# Altium PCB MIET_464512_002_E3.PcbDoc
Units mm, origin at the board's own origin, x right, y up, seen from the top; angles counter-clockwise.
Board outline 137.75 x 63.75 mm, 2 copper layers (Top Layer, Bottom Layer), stack 1.535 mm thick; 68 components, 92 nets, 342 pads, 86 vias.
Unrouted connection lines stored in the file: 4.
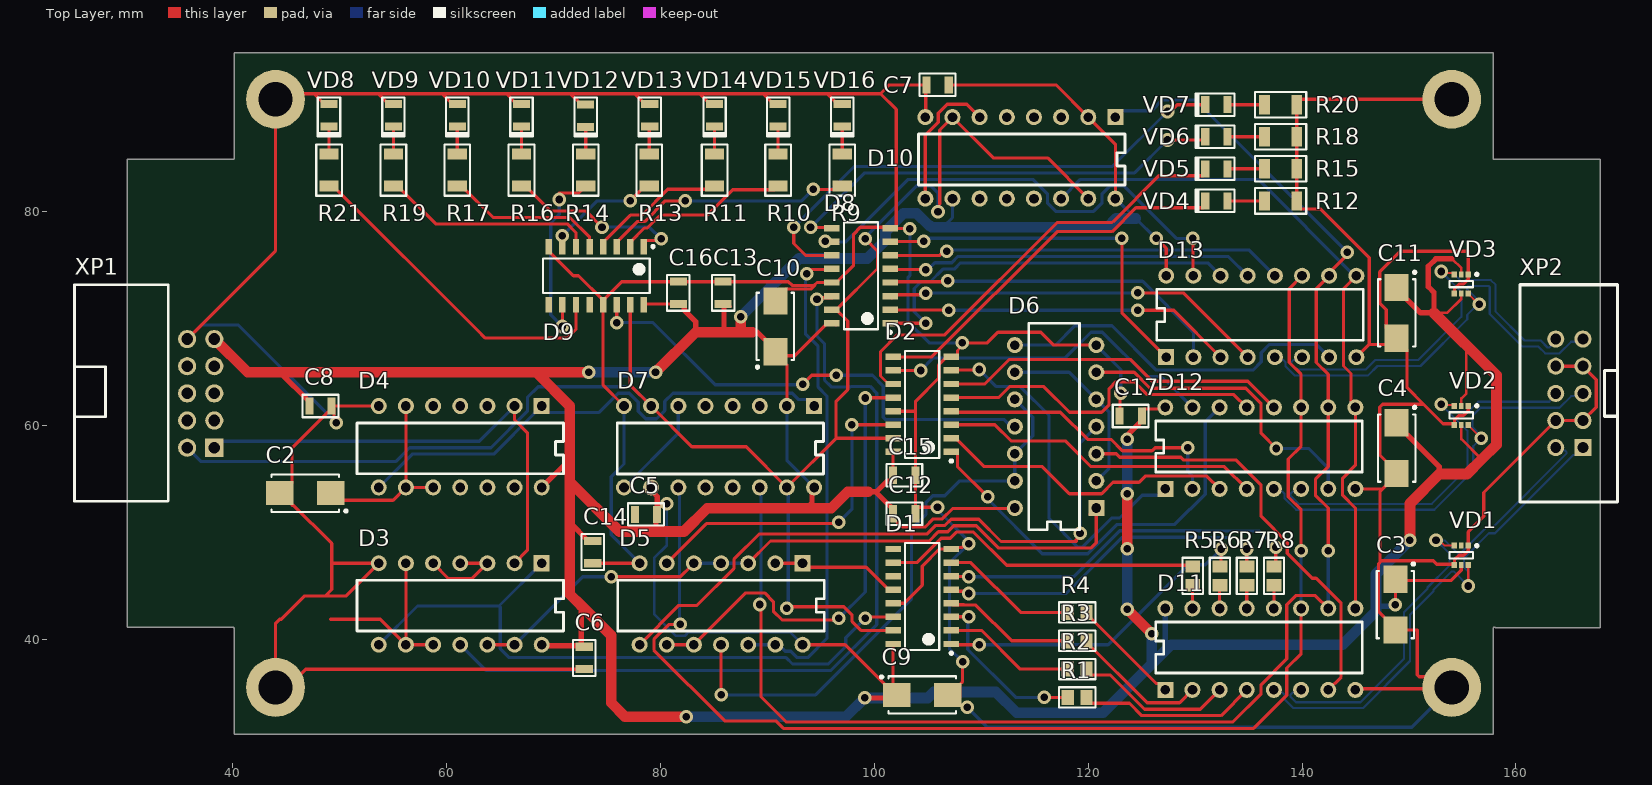
[diagram p0: Top Layer view]
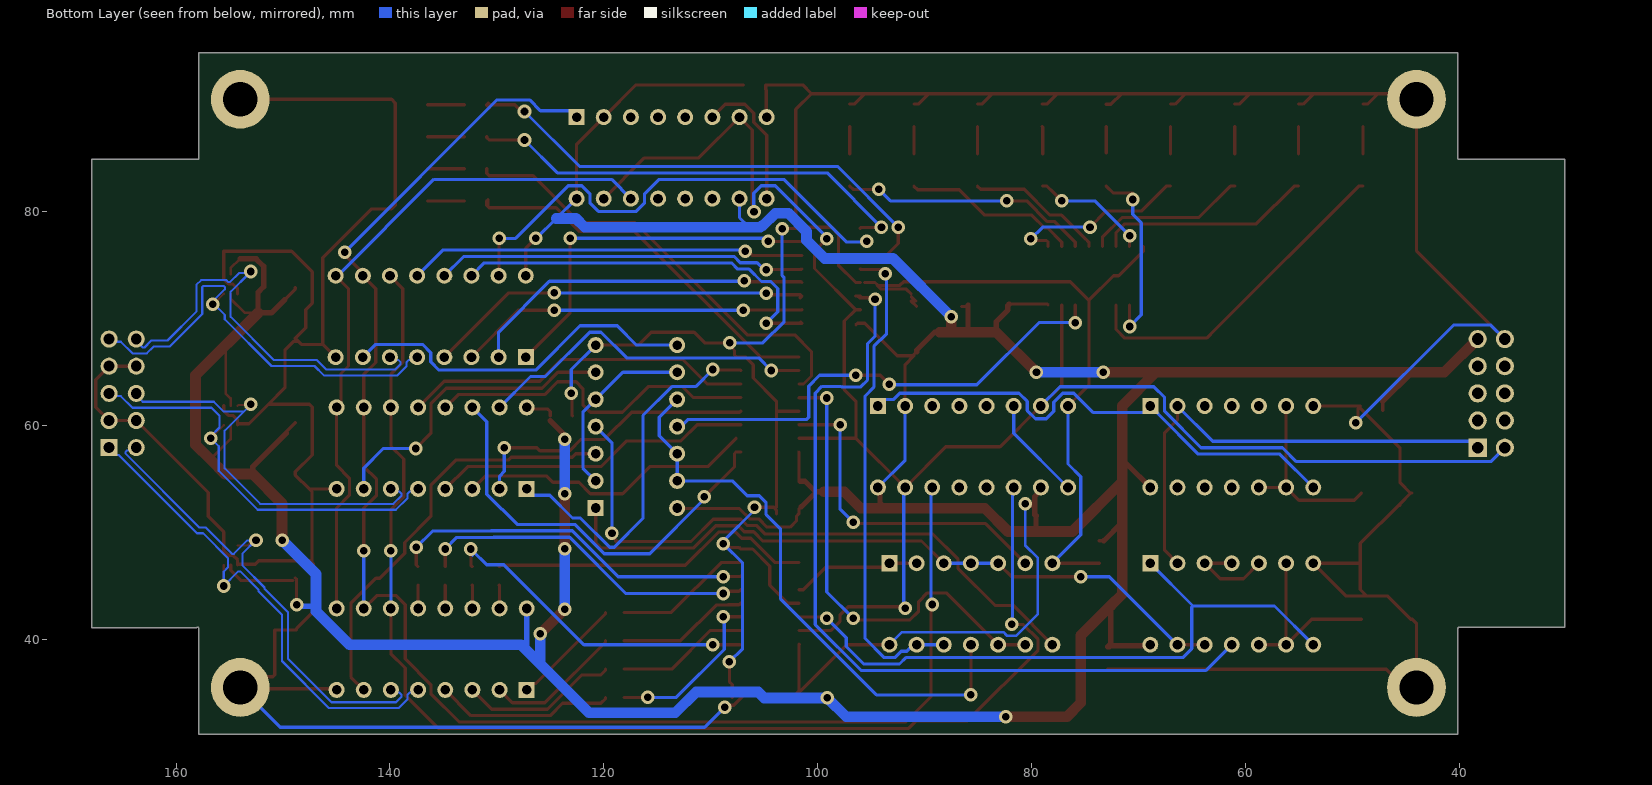
[diagram p1: Bottom Layer view, seen from below]
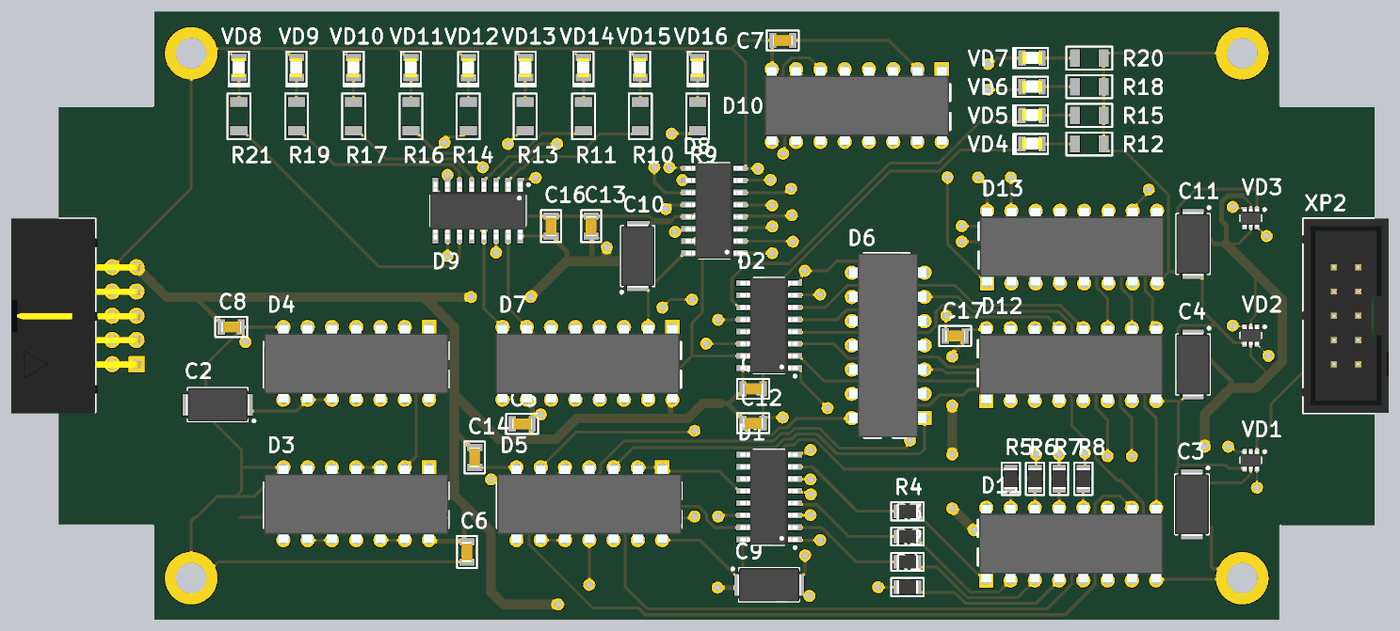
[diagram p2: 3D render of the assembled board from above, using the file's embedded part models]

## Layer stack, top to bottom
Top Solder: solder mask 0.0102, Solder Resist, Dk 3.5
Top Layer: signal copper 0.018
Dielectric 1: core 1.4986, Core-043, Dk 4.3
Bottom Layer: signal copper 0.018
Bottom Solder: solder mask 0.0102, Solder Resist, Dk 3.5

## Board outline
40.127,41 ccw(c40,41) 40,41.127 30.127,41.127 30.127,84.873 40,84.873 ccw(c40,85) 40.127,85 40.127,94.873 157.873,94.873 157.873,85 ccw(c158,85) 158,84.873 167.873,84.873 167.873,41.068 158.107,41.068 ccw(c158,41) 157.873,41 157.873,31.127 40.127,31.127

## Design rules (kind name [scope] priority, off if disabled: settings)
Clearance [All] p1: gap=0.3 ignorepadtopadclearanceinfootprint=FALSE
DiffPairsRouting [All] p1: maxlimit=0.77 minlimit=0.2 mostfreqgap=0.35 toplayer_minwidth=0.2 toplayer_maxwidth=0.5 toplayer_prefwidth=0.38 bottomlayer_minwidth=0.2 bottomlayer_maxwidth=0.5 bottomlayer_prefwidth=0.38 maxuncoupledlength=12.7
HoleSize [All] p1: absolutevalues=TRUE maxlimit=4.5 minlimit=0.3 maxpercent=80.000 minpercent=20.000
HoleToHoleClearance [All] p1: gap=0.8 allowstackedmicrovias=TRUE
PolygonConnect [All] p1: connectstyle=Relief reliefconductorwidth=0.254 reliefentries=4 polygonreliefangle="90 Angle" airgapwidth=0.254
RoomDefinition Room1 [False] p1: confinementstyle=ConfineIn formatcopy=TRUE lockcomponents=FALSE outline 177.316,96.534 202.064,96.534 202.064,66.232 177.316,66.232
RoutingVias Via_for_Room [TouchesRoom('Room1')] p1: holewidth=0.2 width=0.5 viastyle="Through Hole" minholewidth=0.2 minwidth=0.5 maxholewidth=0.2 maxwidth=0.5
RoutingVias [All] p2: holewidth=0.711 width=1.27 viastyle="Through Hole" minholewidth=0.711 minwidth=1.27 maxholewidth=0.711 maxwidth=1.27
SolderMaskExpansion [All] p1: expansion=0.102
Width Width_5V [InNet('+5V')] p1: maxlimit=1 minlimit=0.25 preferedwidth=0.5 minimp=50.000000 maximp=50.000000 favimp=50.000000
Width Width_for_Room [WithinRoom('Room1') or TouchesRoom('Room1')] p2: maxlimit=0.1 minlimit=0.1 preferedwidth=0.1 minimp=50.000000 maximp=50.000000 favimp=50.000000
Width [All] p3: maxlimit=0.3 minlimit=0.3 preferedwidth=0.3 minimp=50.000000 maximp=50.000000 favimp=50.000000
27 further rules are at their usual default settings.

## Classes and differential pairs
component class MIET_464512_002_E3_Sheet_2: C2 C5 C6 C7 C8 D3 D4 D7 D10 XP1
component class MIET_464512_002_E3_Sheet_1: C3 C4 C9 C10 C11 C12 C13 C14 C15 C16 C17 D1 D2 D5 D6 D8 D9 D11 D12 R1 R2 R3 R4 R5 R6 R7 R8 R9 R10 R11 R12 R13 R14 R15 R16 R17 R18 R19 R20 R21 VD1 VD2 VD3 VD4 VD5 VD6 VD7 VD8 VD9 VD11 VD13 VD14 VD15 VD16
differential pair Out3: +Out3_P -Out3_N
differential pair Out2: +Out2_P -Out2_N
differential pair Out1: +Out1_P -Out1_N

## Components (designator, comment, footprint, x,y, rotation, side; value= is the part's Value field where it differs from the comment)
C2 "C" C-Tantal 46.775,53.667 r180 top
C3 "C" C-Tantal 148.737,43.241 r270 top
C4 "C" C-Tantal 148.854,57.885 r270 top
C5 "=Size" 0805_N 78.645,51.674 r0 top
C6 "=Size" 0805_N 72.865,38.25 r270 top
C7 "=Size" 0805_N 105.91,91.85 r0 top
C8 "=Size" 0805_N 48.2,61.817 r0 top
C9 "C" C-Tantal 104.48,34.798 r0 top
C10 "C" C-Tantal 90.744,69.255 r90 top
C11 "C" C-Tantal 148.854,70.524 r270 top
C12 "=Size" 0805_N 102.805,51.744 r180 top
C13 "=Size" 0805_N 85.86,72.395 r90 top
C14 "=Size" 0805_N 73.665,48.159 r90 top
C15 "=Size" 0805_N 102.805,55.345 r180 top
C16 "=Size" 0805_N 81.666,72.395 r90 top
C17 "=Size" 0805_N 123.969,60.881 r0 top
D1 "SOIC-16" SO16-N 104.475,44 r180 top
D2 "SOIC-16" SO16-N 104.475,61.968 r180 top
D3 "74AC00PC" DIP14 68.89,47.109 r270 top
D4 "74AC00PC" DIP14 68.89,61.817 r270 top
D5 "74AC00PC" DIP14 93.284,47.109 r270 top
D6 "74AC00PC" DIP14 120.76,52.274 r180 top
D7 "MC14520BCP" DIP16 94.366,61.817 r270 top
D8 "SOIC-16" SO16-N 98.749,74 r180 top
D9 "SOIC-16" SO16-N 74,74 r270 top
D10 "MC14520BCP" DIP16 122.55,88.834 r270 top
D11 "DIP-16" DIP16 127.213,35.264 r90 top
D12 "DIP-16" DIP16 127.213,54.064 r90 top
D13 "DIP-16" DIP16 127.3,66.38 r90 top
R1 "0805" RES_0805_2012_N 118.97,34.564 r0 top
R2 "0805" RES_0805_2012_N 118.97,37.212 r0 top
R3 "0805" RES_0805_2012_N 118.97,39.86 r0 top
R4 "0805" RES_0805_2012_N 118.97,42.508 r0 top
R5 "0805" RES_0805_2012_N 129.782,45.925 r270 top
R6 "0805" RES_0805_2012_N 132.316,45.925 r270 top
R7 "0805" RES_0805_2012_N 134.849,45.925 r270 top
R8 "0805" RES_0805_2012_N 137.382,45.925 r270 top
R9 "P1-12-0,25-5%" RES_1206 97,83.888 r90 top
R10 "P1-12-0,25-5%" RES_1206 91,83.888 r90 top
R11 "P1-12-0,25-5%" RES_1206 85.06,83.888 r90 top
R12 "P1-12-0,25-5%" RES_1206 138,81 r0 top
R13 "P1-12-0,25-5%" RES_1206 78.95,83.888 r90 top
R14 "P1-12-0,25-5%" RES_1206 73,83.888 r90 top
R15 "P1-12-0,25-5%" RES_1206 138,84 r0 top
R16 "P1-12-0,25-5%" RES_1206 67,83.888 r90 top
R17 "P1-12-0,25-5%" RES_1206 61,83.888 r90 top
R18 "P1-12-0,25-5%" RES_1206 138,87 r0 top
R19 "P1-12-0,25-5%" RES_1206 55.023,83.888 r90 top
R20 "P1-12-0,25-5%" RES_1206 138,90 r0 top
R21 "P1-12-0,25-5%" RES_1206 49,83.888 r90 top
VD1 "SOT-363" SOT363_NXP 154.9,47.859 r270 top
VD2 "SOT-363" SOT363_NXP 154.9,60.934 r270 top
VD3 "SOT-363" SOT363_NXP 154.9,73.225 r270 top
VD4 "0805" 0805_LightDiode 132,81 r0 top
VD5 "0805" 0805_LightDiode 132,84 r0 top
VD6 "0805" 0805_LightDiode 132,87 r0 top
VD7 "0805" 0805_LightDiode 132,90 r0 top
VD8 "0805" 0805_LightDiode 49,89 r90 top
VD9 "0805" 0805_LightDiode 55.023,89 r90 top
VD10 "0805" 0805_LightDiode 61,89 r90 top
VD11 "0805" 0805_LightDiode 67,89 r90 top
VD12 "0805" 0805_LightDiode 73,88.984 r90 top
VD13 "0805" 0805_LightDiode 79,89 r90 top
VD14 "0805" 0805_LightDiode 85.06,89 r90 top
VD15 "0805" 0805_LightDiode 91,89 r90 top
VD16 "0805" 0805_LightDiode 97,89 r90 top
XP1 "TE_1-1634689-0" BH-10R 37,63 r0 top
XP2 "TE_1-1634688-0 \"TE Connectivity\"" TE_1-1634688-0_IDC10_V 165,63 r90 top locked

## Footprints (in the part's own frame and the unit in brackets; to place one, negate y for a bottom-side part, rotate by r counter-clockwise, add the part's x,y. Pads: shape width x height; smd on the part's side, far side on the other; paste and mask are expansions set on the pad)
0805_LightDiode [mm] "Светодиод 0805 прямой высота 1,2 мм"
  rect 0.75x1.6 smd: A(-1.05,0) K(1.05,0)
  silkscreen extent -1.97,-1.05 1.68,1.05, body extent -1.03,-0.6 1.03,0.65, height 0.9
0805_N [mm] "Резистор, конденсатор"
  rect 0.75x1.6 smd: 1(-1.05,0) 2(1.05,0)
  silkscreen extent -1.68,-1.05 1.68,1.05, body extent -1.05,-0.58 1.05,0.58, height 1
BH-10R [mm] "Разъем угловой 2х5х2,54 типа ВН"
  rect 1.7x1.7 hole 1.1: 1(1.27,-5.08)
  round 1.7 hole 1.1: 2(-1.27,-5.08) 3(1.27,-2.54) 4(-1.27,-2.54) 5(1.27,0) 6(-1.27,0) 7(1.27,2.54) 8(-1.27,2.54) 9(1.27,5.08) 10(-1.27,5.08)
  silkscreen extent -11.8,-10.1 -3.05,10.15, body extent -11.85,-10.2 1.65,10.15, height 9.13
C-Tantal [mm]
  rect 2.55x2.25 smd: +(-2.375,0) -(2.375,0)
  silkscreen extent -3.93,-1.75 3.15,1.8, body extent -3.37,-1.75 3.37,1.75, height 2.81
DIP14 [mm]
  rect 1.5x1.5 hole 0.9: 1(0,0)
  round 1.5 hole 0.9: 2(0,-2.54) 3(0,-5.08) 4(0,-7.62) 5(0,-10.16) 6(0,-12.7) 7(0,-15.24) 8(7.62,-15.24) 9(7.62,-12.7) 10(7.62,-10.16) 11(7.62,-7.62) 12(7.62,-5.08) 13(7.62,-2.54) 14(7.62,0)
  silkscreen extent 1.58,-17.27 6.33,2.03, body extent -0.25,-17.27 7.95,2.03, height 5.08
DIP16 [mm]
  rect 1.5x1.5 hole 0.9: 1(0,0)
  round 1.5 hole 0.9: 2(0,-2.54) 3(0,-5.08) 4(0,-7.62) 5(0,-10.16) 6(0,-12.7) 7(0,-15.24) 8(0,-17.78) 9(7.62,-17.78) 10(7.62,-15.24) 11(7.62,-12.7) 12(7.62,-10.16) 13(7.62,-7.62) 14(7.62,-5.08) 15(7.62,-2.54) 16(7.62,0)
  silkscreen extent 1.58,-18.41 6.35,0.89, body extent -0.25,-18.54 7.95,0.76, height 5.08
RES_0805_2012_N [mm] "Rezistor 0805"
  rect 1.15x1.4 smd: 1(-0.875,0) 2(0.875,0)
  silkscreen extent -1.7,-0.95 1.7,0.95, body extent -1.1,-0.7 1.1,0.7, height 0.6
RES_1206 [mm]
  rect 1x1.8 smd: 0(-1.5,0) 1(1.5,0)
  silkscreen extent -2.4,-1.2 2.4,1.2, body extent -2.4,-0.8 1.6,1.2, height 0.6
SO16-N [mm] "SOIC, 16-Leads, Body 9,90x3,90mm, Pitch 1,27mm, IPC Medium Density"
  rect 1.45x0.6 smd: 1(-2.725,4.445) 2(-2.725,3.175) 3(-2.725,1.905) 4(-2.725,0.635) 5(-2.725,-0.635) 6(-2.725,-1.905) 7(-2.725,-3.175) 8(-2.725,-4.445) 9(2.725,-4.445) 10(2.725,-3.175) 11(2.725,-1.905) 12(2.725,-0.635) 13(2.725,0.635) 14(2.725,1.905) 15(2.725,3.175) 16(2.725,4.445)
  silkscreen extent -2.85,-5 1.6,5.42, body extent -3,-5 3,5, height 1.45
SOT363_NXP [mm]
  rect 0.55x0.5 smd: 1(-0.9,0.65) 3(-0.9,-0.65) 4(0.9,-0.65) 6(0.9,0.65)
  rect 0.55x0.4 smd: 2(-0.9,0) 5(0.9,0)
  silkscreen extent -1.02,-1.1 0.3,1.58, body extent -1.15,-1.1 1.15,1.1, height 1.1
TE_1-1634688-0_IDC10_V [mm]
  rect 1.6x1.6 hole 1.02: 1(-5.08,-1.27)
  round 1.6 hole 1.02: 2(-5.08,1.27) 3(-2.54,-1.27) 4(-2.54,1.27) 5(0,-1.27) 6(0,1.27) 7(2.54,-1.27) 8(2.54,1.27) 9(5.08,-1.27) 10(5.08,1.27)
  silkscreen extent -10.16,-4.5 10.16,4.6, body extent -10.16,-4.32 10.16,4.9, height 6.41

## Part data
C2 C3 C4 C9 C10 C11: library part K53-65_C_10%, "К53-65 Конденсатор танталовый C(6032) 0,47-100 мкФ", Manufacturer="ОАО \"Элеконд\"", Tolerance=10%, BOM="Конденсатор К53-65 \"C\" - *B - *мкФ ±10% АЖЯР.673546.004 ТУ", Created_by=Желобаев, Issue_date=6.01.2019, Name="Конденсатор К53-65", Size=C, TU="АЖЯР.673546.004 ТУ", Version=0, Weight=0,3
C5 C6 C7 C8 C12 C13 C14 C15 C16 C17: library part К10-79_0805_Н90, "Чип конденсатор 0805 Н90 ряд Е6", Case=0805, Manufacturer="ООО \"Кулон\"", Tolerance=+80%-20%, BOM="Конденсатор К10-79-*-B-*+80%-20%-Н90 АЖЯР.673511.004 ТУ", Created_by=Желобаев, Issue_date=19_12_2018, Name="Конденсатор К10-79", TKE=Н90, TU="АЖЯР.673511.004 ТУ", Type=K10-79, Version=0, Weight=0.05
D1 D2 D8 D9: library part HCF4017BM1, "Декадный счетчик c 10 декодированными выходами", Manufacturer=STMicroelectronics, Power_Voltage="-0.5 -22 V", BOM="Микросхема HCF4017BM1 \"STMicroelectronics\"", Case=SOIC-16, Created_by=Желобаев, Issue_date=05.04.2019, Name="Микросхема HCF4017BM1", Version=0
D3 D4 D5 D6: "4 элемента 2И-НЕ TTL PDIP-14", Case=DIP-14, Manufacturer="ON Semiconductor", Power_Voltage="4.5 - 5.5 V", BOM="Микросхема 74AC00PC \"ON Semiconductor\"", Created_by=Желобаев, Issue_date=10.04.2019, Name="Микросхема 74AC00PC", Version=0
D7 D10: "Два двоичных счетчика", Case=DIP-16, Manufacturer=Motorola, BOM="Микросхема MC14520BCP \"Motorola\"", Created_by=Желобаев, Issue_date=6.01.2019, Name="Микросхема MC14520BCP", Version=0
D11 D12 D13: library part 74HC151N, "мультиплексор 8 канальный CMOS", Manufacturer="NXP Semiconductors", Power_Voltage="2.0 -6.0 V", BOM="Микросхема 74HC151N \"NXP Semiconductors\"", Case=DIP-16, Created_by=Желобаев, Issue_date=05.04.2019, Name="Микросхема 74HC151N", Version=0
R1 R2 R3 R4 R5 R6 R7 R8: library part Р1-12-0,125-5%, "Резистор от 0,75 Ом до 2 МОм", Manufacturer="ОАО \"НПО \"Эркон\"", Tolerance=5%, Voltage=150, BOM="Резистор Р1-12-0,125 * 5%-M-\"A\" АЛЯР.434110.005 ТУ", ComponentLink1Description="Сайт производителя", ComponentLink1URL=https://www.erkon-nn.ru/catalog/rezistory-obshchego-primeneniya/, Created_by=Желобаев, Hight=0,5, Issue_date=05_12_2018, LiveStatus=Производится, Name="Резистор Р1-12-0,125", Reliability=0,000001, Size=0805, TKR=M, TU="АЛЯР.434110.005 ТУ", Type="Р1-12-0,125±5%-М-\"А\"", Version=00, Weight=0,01
R9 R10 R11 R12 R13 R14 R15 R16 R17 R18 R19 R20 R21: "Резистор 270 Ом M-\"A\" АЛЯР.434110.005 ТУ", Manufacturer="ОАО \"КБ \"ИКАР\"\"", Tolerance=5%, Created_by=Сарынина, Hight=0,5, Issue_date=23_09_2020, Live_status="Дед внутри", Name="Резистор Р1-12-0,25", Reliability=0.000001, Size=0805, TKR=M, TU="АЛЯР.434110.005 ТУ", Type="Р1-12-0,25±5%-М-\"А\"", Version=00
VD1 VD2 VD3: library part BAV99S, "Высокоскоростные, переключающие диоды", Manufacturer=Nexperia, Voltage=100, BOM="Диод BAV99S \"Nexperia\"", Case=SOT-363, Created_by=Желобаев, Issue_date=07.01.2019, Name="Диод BAV99S", Version=0
VD4 VD5 VD6 VD7 VD9 VD10 VD11 VD12 VD13 VD14 VD15 VD16: library part AP2012MGC, "светодиод 0805 зеленый", Manufacturer=Kingbright, BOM="Диод AP2012MGC  \"Kingbright\"", Case=0805, Created_by=Желобаев, Issue_date=13.05.2019, Name="Диод AP2012MGC", Version=0
VD8: library part AP2012EC, "светодиод 0805 красный", Manufacturer=Kingbright, BOM="Диод AP2012EC  \"Kingbright\"", Case=0805, Created_by=Желобаев, Issue_date=13.05.2019, Name="Диод AP2012EC", Version=0
XP1: "Вилка типа BH-10R угловая правая двухрядная 2х5х2.54", Case=BH-10R, Manufacturer="TE Connectivity", BOM="Вилка угловая TE_1-1634689-0 \"TE Connectivity\"", Created_by=Желобаев, Issue_date=13.05.2019, Name="Вилка угловая TE_1-1634689-0", Version=0
XP2: "Вилка прямая"

## Free pads (board coordinates)
  round 5.5 hole 3.2: M1(44,90.5) M2(44,35.5) M3(154,90.5) M4(154,35.5)

## Via types
v1: diameter 1.27, hole 0.711, Top Layer to Bottom Layer, 86 vias

## Nets (pads, with @x,y where several pads share a name; then routed paths per layer and width w, separated by ;. In a path a pad name is that pad's centre, name@x,y a point inside that pad or via, vN(x,y) a via of type N, cw(c..) or ccw(c..) an arc to the next point about the centre after c; other vN are vias at no path point)
+5V: C3.+ C4.+ C5.2 C6.1 C7.2 C8.1 C9.+ C10.+ C11.+ C12.2 C13.1 C14.2 C15.2 C16.1 C17.2 D1.16 D2.16 D3.14 D4.14 D5.14 D6.14 D7.2 D7.10 D7.16 D8.16 D9.16 D10.2 D10.10 D10.16 D11.16 D12.16 D13.16 VD1.2 VD1.5 VD2.2 VD2.5 VD3.2 VD3.5 XP1.9 | length 513
  Top Layer w0.25: 152.345,70.524 153.575,70.524 154.9,71.849 VD3.5 ; 154.024,75.585 154.9,74.709 VD3.2 ; VD2.5 154.9,58.736 156.811,56.825 ; VD2.2 154.9,62.534 155.366,63 155.366,67.395
  Top Layer w0.3: C8.1@47.15,61.392 C8.1 C8.1@47.15,62.242 ; D4.14 D4.14@69.119,53.968 ; C14.2@73.24,49.209 C14.2 ; D9.16 78.515,71.345 C16.1 C16.1@82.091,71.345 ; C13.1 85.942,71.262 86.085,71.12 C13.1@86.546,71.12 ; C10.+@91,66.666 C10.+@91,66.516 ; D7.2 91.826,65.69 C10.+@91,66.516 ; D5.14@93.317,39.522 D5.14 97.263,39.489 101.955,34.798 C9.+ 101.755,35.148 101.755,39.555 D1.16@101.722,39.522 ; D8.16@96.014,69.565 D8.16 ; D8.16@96.422,69.405 96.272,69.555 D8.16 ; C12.2@101.53,52.394 101.755,52.169 C12.2 101.98,51.519 101.98,51.094 102.58,50.494 104.74,50.494 105.499,51.253 106.36,51.253 107.336,52.229 113.095,52.229 D6.14 ; C15.2@101.53,54.695 101.63,54.795 101.755,54.92 C15.2 101.755,57.518 D2.16 ; C7.2 116.994,91.85 D10.2 122.55,86.294 D10.16 D10.16@122.55,80.889 ; C17.2 125.019,61.306 125.244,61.531 127.059,61.531 D12.16 ; v1(126.364,77.49) 127.3,76.554 D13.16 ; v1(148.737,43.241) C3.+ C3.+@148.854,45.732 ; C4.+ 148.854,60.234 C4.+@149.829,59.259 ; C11.+ 148.854,72.749 C11.+@149.829,71.774 ; C3.+@149.104,45.504 153.956,45.504 154.9,46.448 VD1.5 ; v1(150.095,49.277) v1@150.095,49.54 ; C10.+@91,66.516 92.575,66.516 94.012,67.953 94.012,67.968 95.599,69.555 D8.16
  Top Layer w0.5: 44.432,64.961 C8.1@47.15,62.242 ; D4.14 71.065,56.373 ; D3.14@68.984,39.395 C6.1@72.605,39.395 ; 71.521,50.928 C14.2@73.24,49.209 ; 72.566,43.166 72.575,43.166 72.575,43.157 72.575,39.425 C6.1@72.605,39.395 ; C6.1@72.7,39.3 C6.1@72.605,39.395 ; C6.1 72.77,39.395 C6.1@72.605,39.395 ; D7.10@79.126,53.927 79.695,53.358 79.695,52.516 ; D7.10@79.126,54.176 D7.10 ; 79.537,50.074 79.587,50.124 79.587,51.532 79.695,51.64 C5.2 ; C5.2@79.57,51.549 C5.2 ; v1@80.44,52.516 79.695,52.516 ; C16.1@82.091,71.345 82.216,71.22 82.216,70.795 83.29,69.721 83.29,68.714 ; 85.942,68.714 C13.1@85.942,71.262 ; 88.594,68.714 89.06,68.714 90.744,67.03 C10.+ ; 93.659,52.249 94.175,52.764 D7.16@94.175,54.006 ; v1(99.094,34.514) C9.+@101.821,34.514 ; 99.412,53.8 100.124,53.8 ; C12.2@101.53,52.394 100.124,53.8 ; C15.2@101.63,54.795 101.205,54.795 100.21,53.8 100.124,53.8 ; v1(123.652,58.714) 123.8,58.861 123.8,59.236 C17.2@125.019,60.456 ; C4.+@149.687,59.277 152.842,56.121 152.842,55.451 ; C11.+@149.829,71.774 151.079,70.524 152.345,70.524 152.345,72.445 151.82,72.97 151.82,74.891 152.514,75.585 154.024,75.585 ; C5.2 79.695,52.516
  Top Layer w1: XP1.9 41.389,64.961 44.432,64.961 68.378,64.961 ; 72.566,43.166 72.575,43.157 75.386,40.346 75.386,34.049 76.685,32.75 v1(82.416,32.75) ; 72.575,43.166 71.521,44.219 71.521,50.928 71.521,54.728 ; v1(73.287,64.961) 68.378,64.961 ; v1(79.537,64.961) 83.29,68.714 85.942,68.714 87.496,68.714 ; v1(87.496,70.162) 87.496,68.714 ; 88.594,68.714 87.496,68.714 ; 99.412,53.8 97.514,53.8 95.963,52.249 93.659,52.249 84.38,52.249 82.205,50.074 79.537,50.074 76.174,50.074 71.521,54.728 ; v1(123.652,42.81) v1(125.943,40.519) ; v1(123.652,48.459) v1(123.652,53.597) ; v1@150.095,49.54 150.095,52.703 152.842,55.451 155.437,55.451 156.811,56.825 158.185,58.198 158.185,64.684 152.345,70.524 ; 68.378,64.961 71.521,61.817 71.521,54.728
  Bottom Layer w0.25: v1(80.584,52.661) 80.584,48.771 79.409,47.596 79.409,42.348 81.415,40.342 82.315,40.342 82.637,40.664 92.109,40.664 D5.14
  Bottom Layer w0.3: D7.2 91.826,56.737 D7.16 D7.16@94.484,54.079 ; 106.415,78.545 107.31,79.44 D10.10 ; D10.16 122.595,81.214 124.457,79.352 126.319,77.49 v1(126.364,77.49) ; D13.16 D13.16@127.3,74.048
  Bottom Layer w0.5: 127.213,38.959 D11.16 ; 146.917,42.616 147.395,43.093 v1@148.59,43.093
  Bottom Layer w1: v1(73.287,64.961) v1(79.537,64.961) ; v1(82.416,32.75) 97.331,32.75 v1(99.094,34.514) 104.987,34.514 105.545,35.072 111.365,35.072 113.308,33.129 121.382,33.129 125.943,37.689 ; v1(87.496,70.162) 92.947,75.614 99.343,75.614 101.039,77.31 101.039,78.143 102.736,79.839 103.953,79.839 105.128,78.664 105.242,78.664 105.361,78.545 106.415,78.545 121.792,78.545 122.599,79.352 124.457,79.352 ; v1(123.652,42.81) v1(123.652,48.459) ; v1(123.652,53.597) v1(123.652,58.714) ; v1(125.943,40.519) 125.943,37.689 ; v1(150.095,49.277) 146.917,46.1 146.917,42.616 143.791,39.489 127.743,39.489 127.213,38.959 125.943,37.689
Canal16_0: D2.3 D12.4 | length 30.1
  Top Layer w0.3: D2.3 111.274,60.063 112.783,58.554 117.863,58.554 120.263,56.154 132.743,56.154 D12.4
Canal16_1: D2.2 D12.3 | length 28
  Top Layer w0.3: D2.2@107.625,58.793 110.264,56.154 115.709,56.154 118.249,53.614 121.257,53.614 122.325,54.682 124.763,54.682 125.345,55.264 131.093,55.264 D12.3
Canal16_2: D2.4 D12.2 | length 27.8
  Top Layer w0.3: D2.4 107.299,61.234 117.404,61.234 119.944,58.694 122.138,58.694 123.203,57.629 125.979,57.629 126.271,57.921 v1(129.31,57.921)
  Bottom Layer w0.3: v1(129.31,57.921) 129.31,55.707 129.753,55.264 D12.2
Canal16_3: D2.7 D12.1 | length 34.8
  Top Layer w0.3: D2.7 107.243,65.186 109.782,65.186 v1(109.825,65.228)
  Bottom Layer w0.3: v1(109.825,65.228) 111.419,63.634 113.637,63.634 116.334,60.938 116.334,51.303 119.03,48.607 119.454,48.607 122.191,51.344 122.933,51.344 125.054,53.464 126.613,53.464 D12.1
Canal16_4: D2.10 D12.15 | length 32.8
  Top Layer w0.3: D2.10@102.175,65.143 D2.10 101.753,65.14 104.333,65.14 v1(104.336,65.136)
  Bottom Layer w0.3: v1(104.336,65.136) 105.514,66.314 117.863,66.314 120.263,68.714 121.331,68.714 125.465,64.58 126.857,64.58 D12.15
Canal16_5: D2.1 D12.14 | length 39.5
  Top Layer w0.3: D2.1 107.625,57.523 107.775,57.373 107.775,56.139 v1(110.6,53.314)
  Bottom Layer w0.3: v1(110.6,53.314) 110.6,53.117 115.71,48.007 119.969,48.007 122.706,50.744 128.105,50.744 129.51,52.149 129.534,52.149 130.953,53.567 130.953,60.344 D12.14
Canal16_6: D2.5 D12.13 | length 32.1
  Top Layer w0.3: D2.5 111.611,62.603 112.643,63.634 115.852,63.634 118.252,61.234 121.257,61.234 121.96,61.937 121.96,63.449 122.597,64.086 124.336,64.086 125.538,62.884 133.633,62.884 D12.13
Canal16_7: D2.6 D12.12 | length 33
  Top Layer w0.3: D2.6 110.341,63.873 112.643,66.174 123.945,66.174 125.992,64.127 134.936,64.127 137.373,61.69 D12.12
Canal16_8: D8.3 D13.4 | length 36.3
  Top Layer w0.3: D8.3@101.624,71.945 D8.3 101.605,72.227 104.695,72.227 v1(104.826,72.358) ; v1(124.644,72.395) 128.905,72.395 D13.4
  Bottom Layer w0.3: v1(104.826,72.358) 104.845,72.377 124.626,72.377 v1(124.644,72.395)
Canal16_9: D8.2 D13.3 | length 33.2
  Top Layer w0.3: D8.2 101.504,70.795 106.885,70.795 106.915,70.825 v1(106.975,70.765) ; v1(124.644,70.765) 127.995,70.765 D13.3
  Bottom Layer w0.3: v1@107.02,70.34 106.975,70.385 v1(106.975,70.765) v1(124.644,70.765)
Canal16_10: D8.4 D13.2 | length 32.8
  Top Layer w0.3: D8.4 101.552,73.443 106.828,73.443 106.872,73.487 v1(106.872,73.539)
  Bottom Layer w0.3: v1(106.872,73.539) 106.925,73.485 125.089,73.485 129.84,68.734 D13.2
Canal16_11: D8.7 D13.1 | length 34.7
  Top Layer w0.3: D8.7 101.5,77.202 104.603,77.202 v1(104.63,77.229) ; v1(123.156,77.505) 123.156,70.524 D13.1
  Bottom Layer w0.3: v1(104.63,77.229) 104.63,77.235 104.899,77.505 v1(123.156,77.505)
Canal16_12: D8.10 D13.15 | length 45.6
  Top Layer w0.3: v1(129.783,77.49) 129.811,77.461 129.811,74.029 D13.15
  Bottom Layer w0.3: v1(95.413,77.21) 95.457,77.167 97.332,77.167 103.18,83.014 114.827,83.014 116.2,81.641 116.2,80.787 116.973,80.014 120.507,80.014 121.28,80.787 121.28,81.641 122.053,82.414 123.324,82.414 128.249,77.49 v1(129.783,77.49)
Canal16_13: D8.1 D13.14 | length 37.3
  Top Layer w0.3: D8.1@101.587,69.669 D8.1 v1(104.815,69.555)
  Bottom Layer w0.3: v1(104.815,69.555) 103.741,70.629 103.741,72.808 104.398,73.464 105.256,73.464 106.416,74.624 107.479,74.624 108.056,75.2 131.18,75.2 D13.14
Canal16_14: D8.5 D13.13 | length 34.7
  Top Layer w0.3: D8.5 101.517,74.592 104.763,74.592 v1(104.806,74.549)
  Bottom Layer w0.3: v1(104.806,74.549) 104.99,74.549 105.665,75.224 107.231,75.224 107.807,75.8 133.12,75.8 D13.13
Canal16_15: D8.6 D13.12 | length 37.2
  Top Layer w0.3: D8.6@101.484,75.894 D8.6 106.115,75.905 106.519,76.309 v1(106.782,76.309)
  Bottom Layer w0.3: v1(106.782,76.309) 106.873,76.4 135.06,76.4 D13.12
Canal16_17: D2.9 VD4.A | length 36.4
  Top Layer w0.3: D2.9 105.385,66.413 117.1,78.128 122.239,78.128 124.462,80.35 130.725,80.35 VD4.A@130.821,80.446 ; VD4.A@130.821,80.446 130.821,80.575 130.821,81 130.821,81.129 VD4.A 130.95,80.575 VD4.A@130.821,80.446
Canal16_18: D2.11 VD5.A | length 41.3
  Top Layer w0.3: D2.11 101.325,63.873 100.575,64.623 100.575,66.899 102.146,68.47 106.593,68.47 117.1,78.976 122.239,78.976 ; 122.332,79.069 126.613,83.35 130.725,83.35 130.95,83.575 VD5.A
Canal16_19: D8.9 VD6.A | length 42.5
  Top Layer w0.3: v1(94.034,78.554) 94.088,78.499 95.969,78.499 D8.9 ; v1(127.42,86.695) 130.725,86.695 130.95,86.92 VD6.A
  Bottom Layer w0.3: v1(94.034,78.554) 99.094,83.614 124.339,83.614 v1(127.42,86.695)
Canal16_20: D8.11 VD7.A | length 49.8
  Top Layer w0.3: v1(92.463,78.55) 92.463,77.015 93.584,75.894 96.013,75.894 D8.11 D8.11@96.449,75.905 ; v1(127.42,89.365) 127.682,89.365 128.318,90 VD7.A ; VD7.A@130.725,89.713 130.95,89.938 VD7.A ; VD7.A@130.802,90.148 VD7.A
  Bottom Layer w0.3: v1(92.463,78.55) 98.128,84.214 122.27,84.214 v1(127.42,89.365)
Canal_A_0: D11.4 R1.2 | length 16.8
  Top Layer w0.3: R1.2 119.845,34.439 120.27,34.014 123.869,34.014 125.019,32.864 132.433,32.864 D11.4
Canal_A_1: D11.3 R2.2 | length 14.8
  Top Layer w0.3: R2.2 119.845,37.087 120.27,36.662 122.07,36.662 125.268,33.464 130.493,33.464 D11.3
Canal_A_2: D11.2 R3.2 | length 12.9
  Top Layer w0.3: R3.2 119.845,39.735 125.516,34.064 128.553,34.064 D11.2
Canal_A_3: D11.1 R4.2 | length 10.4
  Top Layer w0.3: R4.2 119.845,42.383 126.364,35.864 126.613,35.864 D11.1
Canal_A_4: D11.15 R5.2 | length 2.2
  Top Layer w0.3: D11.15 129.753,45.021 R5.2
Canal_A_5: D11.14 R6.2 | length 2.2
  Top Layer w0.3: D11.14 132.293,45.027 R6.2
Canal_A_6: D11.13 R7.2 | length 2.2
  Top Layer w0.3: D11.13 134.833,45.034 R7.2
Canal_A_7: D11.12 R8.2 | length 2.2
  Top Layer w0.3: D11.12 137.373,45.041 R8.2
Clock: D1.14 D3.1 D3.8 | length 62.1
  Top Layer w0.3: v1(99.15,41.958) 99.287,42.095 D1.14 D1.14@101.755,42.095
  Bottom Layer w0.3: D3.8 57.274,43.114 64.894,43.114 ; D3.1 64.894,43.114 ; v1(99.15,41.958) 97.332,40.14 97.332,39.322 95.7,37.689 92.342,37.689 91.747,38.284 65.858,38.284 65.01,39.132 65.01,42.999 64.894,43.114
GND: C2.- C3.- C4.- C5.1 C6.2 C7.1 C8.2 C9.- C10.- C11.- C12.1 C13.2 C14.1 C15.1 C16.2 C17.1 D1.8 D1.13 D2.8 D2.13 D3.7 D4.7 D5.7 D6.7 D7.8 D8.8 D8.13 D9.8 D9.13 D10.8 D11.8 D12.8 D13.8 pad.M1 pad.M2 pad.M3 pad.M4 R12.1 R15.1 R18.1 R20.1 VD1.1 VD1.4 VD2.1 VD2.4 VD3.1 VD3.4 VD8.K VD9.K VD10.K VD11.K VD12.K VD13.K VD14.K VD15.K VD16.K XP1.10 XP2.3 XP2.4 XP2.7 XP2.8 | length 596.6
  Top Layer w0.3: XP1.10@36.331,68.681 44,76.35 pad.M1 44.53,91.03 47.595,91.03 ; pad.M2 44,41.502 44.375,41.877 44.525,41.877 46.687,44.039 48.633,44.039 ; C2.- C2.-@44.55,53.667 ; pad.M2@45.125,35.5 46.825,37.2 C6.2 ; 45.525,52.542 C2.-@45.525,52.692 ; VD8.K 48.575,90.05 47.595,91.03 ; C8.2@49.25,61.605 45.525,57.88 45.525,54.642 C2.-@44.55,53.667 ; v1(49.675,60.24) 49.675,60.502 49.475,60.702 49.475,61.592 C8.2 D4.7 ; VD9.K 54.598,90.05 53.617,91.03 ; VD10.K 60.575,90.05 59.595,91.03 ; VD11.K 66.575,90.05 65.595,91.03 ; D9.8 69.555,76.3 71.855,74 72.335,74 D9.13@74.635,71.7 ; VD12.K 72.575,90.034 71.579,91.03 ; C14.1 D5.7 D5.7@78.06,47.125 ; D7.8 74.635,63.768 D9.13 D9.13@74.635,71.7 ; VD13.K 78.575,90.05 77.595,91.03 ; VD14.K 84.635,90.05 83.654,91.03 ; C10.-@90.744,71.123 91.251,71.63 90.833,71.63 C10.-@91.23,72.027 ; VD15.K 90.575,90.05 89.595,91.03 ; C10.-@91.273,72.309 91.719,72.755 94.066,72.755 94.385,73.074 ; D8.13@95.599,73.365 94.636,73.365 94.365,73.094 92.317,73.094 91.965,73.445 76.38,73.445 D9.13@74.635,71.7 ; D8.13 96.449,73.365 98.065,74.981 98.065,77.899 98.701,78.535 101.384,78.535 D8.8 101.899,78.445 D8.8@101.951,78.497 ; VD16.K 96.575,90.05 95.595,91.03 ; D2.13 103.739,61.333 103.855,61.217 C15.1 103.855,52.338 C12.1@103.983,52.211 ; D1.13@101.755,43.365 102.78,43.365 104.48,45.065 104.48,46.84 106.085,48.445 D1.8 ; v1(103.33,78.404) 103.309,78.424 102.024,78.424 D8.8@101.951,78.497 ; C12.1 103.855,52.083 C12.1@103.983,52.211 ; 103.855,61.333 103.855,62.272 106.021,64.438 106.021,65.659 106.775,66.413 D2.8 107.625,66.413 107.775,66.563 107.775,67.006 108.223,67.454 v1(108.223,67.716) 110.562,67.716 111.56,68.714 115.583,68.714 116.783,67.514 D6.7 ; D10.8 104.815,88.879 104.815,91.38 104.86,91.425 C7.1 101.395,91.85 100.575,91.03 ; v1(105.91,52.338) 104.11,52.338 C12.1@103.983,52.211 ; C9.- 107.83,33.823 108.515,33.823 v1(108.701,33.637) ; D1.8@107.284,48.524 107.205,48.445 D1.8 ; C9.-@107.98,34.564 107.98,35.773 108.251,36.044 v1(108.251,37.883) ; v1(108.825,48.935) 108.563,48.935 108.223,48.595 107.35,48.595 D1.8 ; C17.1 122.983,60.944 122.983,62.937 v1(123.046,63.001) ; D11.8 145.111,35.382 153.882,35.382 pad.M4 153.005,36.495 150.961,36.495 150.782,36.674 150.782,40.866 C3.- 148.737,41.016 147.162,42.591 147.162,47.077 147.426,47.341 152.27,47.341 152.586,47.025 154.185,47.025 VD1.4 154.25,47.421 154.689,47.859 155.111,47.859 155.55,48.298 VD1.1 155.55,50.044 157,51.494 157,53.73 XP2.4 XP2.3 167.52,61.71 167.52,64.29 XP2.7 XP2.8 ; D12.8 147.559,54.064 ; D13.8 146.28,67.58 ; 147.294,47.341 147.294,53.8 147.559,54.064 ; pad.M3 139.85,90.5 139.5,90.15 R20.1 R18.1 R15.1 R12.1 139.5,80.6 139.85,80.25 141.723,80.25 146.28,75.693 146.28,67.58 ; VD3.4 154.25,72.786 154.689,73.225 155.111,73.225 155.55,73.664 VD3.1 155.55,76.285 149.203,76.285 147.279,74.36 147.279,71.438 147.879,70.838 147.879,69.124 C11.- C11.-@148.569,67.864 ; VD2.1 155.55,61.373 155.111,60.934 154.689,60.934 154.25,60.496 154.25,60.059 154.15,60.159 153.19,60.159 151.365,61.985 ; C2.-@44.55,53.667 C2.-@45.525,52.692 ; C2.-@45.525,52.692 49.25,48.967 49.25,47.109 ; 47.595,91.03 53.617,91.03 ; 48.633,44.039 50.579,44.039 D3.7 49.25,47.109 ; 48.633,44.039 49.25,44.656 49.25,47.109 ; 53.617,91.03 59.595,91.03 ; 59.595,91.03 65.595,91.03 ; 65.595,91.03 71.579,91.03 ; 71.579,91.03 77.595,91.03 ; 77.595,91.03 83.654,91.03 ; 83.654,91.03 89.595,91.03 ; 89.595,91.03 95.595,91.03 ; 95.595,91.03 100.575,91.03 ; 100.575,91.03 102.049,89.557 102.049,78.595 D8.8@101.951,78.497 ; 146.28,67.58 148.285,67.58 C11.-@148.569,67.864 ; 147.559,54.064 148.854,55.36 C4.- 148.854,55.66 147.279,57.235 147.279,61.721 147.542,61.985 151.365,61.985 ; C11.-@148.569,67.864 148.988,67.864 149.829,67.024 149.829,63.52 151.365,61.985
  Bottom Layer w0.3: XP1.10 37.03,69.38 40.535,69.38 v1(49.675,60.24) ; D7.8 76.586,56.392 75.386,55.192 75.386,49.767 D5.7 ; v1(103.33,78.404) 103.33,74.017 103.141,73.828 103.141,69.694 105.119,67.716 v1(108.223,67.716) ; v1(105.91,52.338) 105.91,52.094 108.825,49.179 v1(108.825,48.935) ; v1(108.251,37.883) 107.02,39.114 107.02,47.13 v1@108.726,48.836 ; v1(108.701,33.637) 110.572,31.765 150.265,31.765 pad.M4 ; D6.7 123.046,65.228 v1(123.046,63.001)
NetC1_+: D3.6 D3.9 D3.10 | length 18.2
  Top Layer w0.3: 49.125,41.877 53.802,41.877 D3.9 ; D3.6 D3.9 ; D3.10 D3.9
NetC2_+: C2.+ D4.6 D4.9 D4.10 | length 18
  Top Layer w0.3: C2.+ 49.82,52.997 54.99,52.997 D4.9 ; D4.6 D4.9 ; D4.10 D4.9
NetD1_1: D1.1 R6.1 | length 31
  Top Layer w0.3: D1.1@107.265,39.49 v1(109.825,39.49) ; R6.1 132.433,46.917 v1(132.433,48.445)
  Bottom Layer w0.3: v1(109.825,39.49) 121.867,39.49 129.342,46.965 130.953,46.965 v1@132.293,48.305 ; v1@132.293,47.859 v1@132.293,48.305 ; v1(132.433,48.445) v1@132.293,48.305
NetD1_2: D1.2 R2.1 | length 12.4
  Top Layer w0.3: D1.2 110.024,40.825 113.638,37.212 R2.1
NetD1_3: D1.3 R1.1 | length 15.9
  Top Layer w0.3: D1.3 107.208,42.103 108.805,42.103 v1(108.812,42.111) ; v1(115.9,34.564) R1.1
  Bottom Layer w0.3: v1(108.812,42.111) 108.74,42.038 108.74,39.041 113.217,34.564 v1(115.9,34.564)
NetD1_4: D1.4 R3.1 | length 12.3
  Top Layer w0.3: D1.4@107.205,43.365 107.351,43.219 108.375,43.219 108.399,43.196 109.502,43.196 112.838,39.86 R3.1
NetD1_5: D1.5 R7.1 | length 32.1
  Top Layer w0.3: D1.5 107.344,44.491 108.375,44.491 108.585,44.281 v1(108.847,44.281) ; v1(134.833,48.445) 134.833,46.816 R7.1
  Bottom Layer w0.3: v1(108.847,44.281) 117.941,44.281 123.203,49.544 130.298,49.544 130.312,49.53 133.748,49.53 v1(134.833,48.445)
NetD1_6: D1.6 R8.1 | length 34.6
  Top Layer w0.3: D1.6 107.227,45.878 108.786,45.878 v1(108.812,45.852) ; R8.1 137.535,46.952 v1(137.535,48.602)
  Bottom Layer w0.3: v1(108.812,45.852) 118.662,45.852 122.954,50.144 130.547,50.144 130.56,50.13 136.007,50.13 v1(137.535,48.602)
NetD1_7: D1.7 R4.1 | length 13
  Top Layer w0.3: D1.7@107.293,47.268 D1.7 109.023,47.175 113.69,42.508 R4.1
NetD1_10: D1.10 R5.1 | length 30.5
  Top Layer w0.3: D1.10 103.967,47.175 106.245,49.453 107.105,49.453 107.672,50.02 109.274,50.02 112.373,46.922 129.66,46.922 R5.1
NetD1_12: D1.12 D5.1 D5.2 | length 12
  Top Layer w0.3: D5.2 D5.1 93.659,46.734 99.231,46.734 101.33,44.635 D1.12@101.755,44.635
NetD2_12: D2.12 D5.9 D5.10 | length 44
  Top Layer w0.3: D5.9 D5.10 87.97,44.335 89.735,44.335 90.556,43.515 90.556,42.619 91.377,41.799 96.528,41.799 v1(96.688,41.958) ; v1(99.15,62.567) 99.168,62.585 101.732,62.585 D2.12
  Bottom Layer w0.3: v1(96.688,41.958) 99.15,44.42 v1(99.15,62.567)
NetD2_14: D2.14 D5.6 | length 31.2
  Top Layer w0.3: D5.6 84.298,50.823 96.567,50.823 v1(96.688,50.944) ; v1(97.9,60.081) 97.909,60.072 101.741,60.072 D2.14
  Bottom Layer w0.3: v1(96.688,50.944) 97.9,52.156 v1(97.9,60.081)
NetD3_2: D3.2 D4.2 XP1.1 | length 46.2
  Top Layer w0.3: XP1.1 XP1.1@38.871,58.521 ; D3.2 67.55,48.309 67.55,59.309 66.35,60.509 D4.2
  Bottom Layer w0.3: XP1.1 38.871,58.521 63.054,58.521 D4.2
NetD3_3: D3.3 D3.4 D3.5 | length 8.8
  Top Layer w0.3: D3.5 60.173,45.666 62.366,45.666 D3.3 D3.4
NetD3_11: D3.11 D8.14 | length 78.8
  Top Layer w0.3: v1(94.634,71.788) 94.791,71.945 96.086,71.945 D8.14@96.236,72.095 ; D8.14 D8.14@96.236,72.095 ; D8.14@96.449,72.095 D8.14@96.236,72.095
  Bottom Layer w0.3: D3.11 63.67,37.089 95.948,37.089 100.235,41.376 100.235,63.017 99.599,63.652 97.811,63.652 97.761,63.602 95.972,63.602 95.337,64.238 95.337,67.643 94.634,68.346 v1(94.634,71.788)
NetD3_12: D3.12 D3.13 D5.3 D5.4 D5.5 D6.1 | length 66.6
  Top Layer w0.3: D3.12 D3.13 ; v1(75.386,45.852) 81.866,45.852 D5.5@82.855,46.84 ; D5.5@83.124,46.84 D5.5 ; D5.3 90.29,49.195 105.138,49.195 105.996,50.053 106.857,50.053 107.424,50.62 109.523,50.62 111.599,48.544 120.27,48.544 120.76,49.034 D6.1 D6.1@120.16,51.674
  Bottom Layer w0.3: D3.13 72.712,45.852 v1(75.386,45.852) ; D5.5 D5.4 D5.3
NetD4_1: D4.1 D4.8 D7.1 | length 49.2
  Top Layer w0.3: D4.1 D4.1@69.49,61.217
  Bottom Layer w0.3: D4.8 56.774,57.321 64.399,57.321 68.15,61.072 68.15,61.077 D4.1 69.49,61.217 74.256,61.217 76.056,63.017 77.083,63.017 77.926,62.174 77.926,61.32 78.629,60.617 79.623,60.617 80.396,61.39 80.396,62.244 81.169,63.017 92.323,63.017 92.923,62.417 93.766,62.417 D7.1
NetD4_3: D4.3 D4.4 D4.5
NetD5_8: D5.8 D6.4 | length 58.6
  Top Layer w0.3: D5.8 78.044,39.495 81.715,43.166 83.417,43.166 86.864,46.612 86.864,47.466 89.257,49.859 104.954,49.859 105.748,50.653 106.608,50.653 107.175,51.22 109.771,51.22 111.847,49.144 118.879,49.144 118.879,49.309 119.24,49.67 v1(119.24,49.933)
  Bottom Layer w0.3: v1(119.24,49.933) 119.24,58.374 D6.4
NetD5_11: D5.11 D6.10 D6.12 D6.13 | length 54
  Top Layer w0.3: v1(85.664,34.798) D5.11
  Bottom Layer w0.3: v1(85.664,34.798) 94.505,34.798 103.467,43.759 103.467,50.301 104.825,51.659 104.825,52.788 105.461,53.423 106.589,53.423 107.98,54.814 D6.13 D6.12 114.816,59.03 114.816,60.759 D6.10
NetD5_12: D5.12 D5.13 D8.12 | length 46.1
  Top Layer w0.3: v1(93.68,74.179) 93.682,74.179 94.086,74.583 95.971,74.583 D8.12
  Bottom Layer w0.3: D5.12 D5.13 91.069,39.489 91.674,38.884 92.192,38.884 92.787,38.289 93.781,38.289 95.566,40.074 95.566,62.754 94.737,63.583 94.737,67.395 93.549,68.583 93.549,74.048 v1(93.68,74.179)
NetD6_2: D6.2 D6.5 D6.9 | length 17.3
  Bottom Layer w0.3: D6.9 118.22,64.974 D6.5 121.96,61.234 121.96,56.014 D6.2
NetD6_3: D6.3 D11.7 | length 39.6
  Top Layer w0.3: D6.3 122.629,57.354 122.954,57.029 128.667,57.029 128.942,56.754 133.84,56.754 136.173,54.421 136.173,51.499 138.62,49.052 138.62,48.044 140.951,45.712 141.321,45.712 143.653,43.381 143.653,36.464 D11.7
NetD6_6: D6.6 D12.7 | length 29
  Top Layer w0.3: D6.6 124.296,64.974 125.786,63.484 134.73,63.484 136.173,62.041 136.173,59.251 v1(137.58,57.844)
  Bottom Layer w0.3: v1(137.58,57.844) 140.623,57.844 142.453,56.014 D12.7
NetD6_8: D6.8 D13.7 | length 33.8
  Bottom Layer w0.3: D6.8 116.947,67.514 118.747,69.314 122.229,69.314 126.364,65.18 135.417,65.18 136.19,65.953 136.19,66.807 136.963,67.58 141.34,67.58 D13.7
NetD6_11: D6.11 D9.14 | length 45.4
  Top Layer w0.3: v1(75.905,69.62) D9.14 ; v1(93.317,63.85) 94.154,64.687 v1(96.422,64.687)
  Bottom Layer w0.3: v1(75.905,69.62) 79.298,69.62 85.118,63.8 93.267,63.8 v1(93.317,63.85) ; v1(96.422,64.687) 99.827,64.687 100.835,63.679 100.835,60.763 101.049,60.548 112.161,60.548 112.815,59.894 D6.11
NetD7_6: D7.6 D7.9 | length 9.7
  Bottom Layer w0.3: D7.9 81.666,59.277 D7.6
NetD9_1: D9.1 R16.0 | length 17.3
  Top Layer w0.3: R16.0 67.4,82.388 69.744,80.044 73.039,80.044 v1(74.529,78.554) ; D9.1 78.445,77.15 78.595,77.3 79.904,77.3 v1(80.054,77.45)
  Bottom Layer w0.3: v1(74.529,78.554) 78.95,78.554 v1(80.054,77.45)
NetD9_2: D9.2 R10.0 | length 16.4
  Top Layer w0.3: D9.2 77.175,77.15 78.494,78.469 78.764,78.469 79.964,79.669 81.817,79.669 84.377,79.669 86.746,82.037 90.65,82.037 R10.0
NetD9_3: D9.3 R9.0 | length 23.7
  Top Layer w0.3: D9.3 75.905,77.15 77.824,79.069 78.516,79.069 80.447,81 v1(82.3,81) ; v1(94.275,82.075) 96.688,82.075 R9.0
  Bottom Layer w0.3: v1(82.3,81) 93.2,81 v1(94.275,82.075)
NetD9_4: D9.4 R11.0 | length 13
  Top Layer w0.3: D9.4 74.635,77.15 74.954,77.469 74.987,77.469 77.187,79.669 78.267,79.669 80.684,82.085 84.757,82.085 R11.0
NetD9_5: D9.5 R17.0 | length 15.2
  Top Layer w0.3: R17.0 61.4,82.388 64.344,79.444 71.521,79.444 73.365,77.6 D9.5
NetD9_6: D9.6 R19.0 | length 20.2
  Top Layer w0.3: R19.0 55.423,82.388 58.966,78.844 71.273,78.844 72.095,78.022 D9.6
NetD9_7: D9.7 R13.0 | length 11.1
  Top Layer w0.3: D9.7 70.827,76.727 70.827,77.752 v1(70.828,77.754) ; v1(77.154,81) 77.921,81.767 77.929,81.767 78.55,82.388 R13.0
  Bottom Layer w0.3: v1(70.828,77.754) 74.075,81 v1(77.154,81)
NetD9_10: D9.10 R14.0 | length 18
  Top Layer w0.3: v1(70.528,81.129) 70.528,81.704 70.525,81.708 70.555,81.738 72.35,81.738 R14.0 ; v1(70.825,69.255) D9.10
  Bottom Layer w0.3: v1(70.528,81.129) 70.528,79.732 69.74,78.944 69.74,70.34 v1(70.825,69.255)
NetD9_11: D9.11 R21.0 | length 31.6
  Top Layer w0.3: R21.0 49.4,82.388 62.788,69 62.792,69 63.622,68.17 71.274,68.17 72.095,68.991 D9.11
NetD10_6: D10.6 D10.9 | length 13.2
  Top Layer w0.3: D10.9 104.77,87.137 105.97,88.337 105.97,89.191 106.813,90.034 108.65,90.034 D10.6
NetR9_1: R9.1 VD16.A | length 2.6
  Top Layer w0.3: R9.1 VD16.A
NetR10_1: R10.1 VD15.A | length 2.6
  Top Layer w0.3: R10.1 VD15.A
NetR11_1: R11.1 VD14.A | length 2.6
  Top Layer w0.3: R11.1 VD14.A
NetR12_0: R12.0 VD4.K | length 3.5
  Top Layer w0.3: VD4.K R12.0
NetR13_1: R13.1 VD13.A | length 2.6
  Top Layer w0.3: R13.1 78.95,87.9 VD13.A
NetR14_1: R14.1 VD12.A | length 2.5
  Top Layer w0.3: R14.1@73,85.488 VD12.A VD12.A@73,87.957
NetR15_0: R15.0 VD5.K | length 3.5
  Top Layer w0.3: VD5.K R15.0
NetR16_1: R16.1 VD11.A | length 2.6
  Top Layer w0.3: R16.1 VD11.A
NetR17_1: R17.1 VD10.A | length 2.6
  Top Layer w0.3: R17.1 VD10.A
NetR18_0: R18.0 VD6.K | length 3.5
  Top Layer w0.3: VD6.K R18.0
NetR19_1: R19.1 VD9.A | length 2.6
  Top Layer w0.3: R19.1 VD9.A
NetR20_0: R20.0 VD7.K | length 3.5
  Top Layer w0.3: VD7.K R20.0
NetR21_1: R21.1 VD8.A | length 2.6
  Top Layer w0.3: R21.1 VD8.A
Out1_N: D11.6 VD1.3 XP2.2 | length 47.1
  Top Layer w0.2: v1(152.532,49.277) 152.819,49.277 153.337,48.759 VD1.3
  Bottom Layer w0.2: D11.6 139.664,35.015 139.135,35.015 138.918,34.798 138.918,34.632 139.436,34.114 145.469,34.114 149.545,38.189 149.545,42.513 151.743,44.712 151.743,44.849 153.778,46.884 153.778,48.032 v1(152.532,49.277) 152.56,49.25 153.338,49.25 154.604,47.984 154.769,47.984 157.245,50.459 157.825,50.459 164.725,57.359 164.725,57.525 164.598,57.652 163.998,57.652 XP2.2
Out1_P: D11.5 VD1.6 XP2.1 | length 47.7
  Top Layer w0.2: v1(155.55,44.984) VD1.6
  Bottom Layer w0.2: D11.5 137.622,35.015 138.151,35.015 138.368,34.798 138.368,34.404 139.209,33.564 145.697,33.564 150.095,37.961 150.095,42.285 152.293,44.484 152.293,44.621 154.02,46.348 154.186,46.348 v1(155.55,44.984) 155.55,46.327 155.158,46.719 155.158,47.595 157.473,49.909 158.053,49.909 165.384,57.24 165.59,57.24 XP2.1
Out2_N: D12.6 VD2.3 XP2.6 | length 38.8
  Top Layer w0.2: v1(153.005,61.968) 153.072,61.901 154.183,61.901 VD2.3
  Bottom Layer w0.2: D12.6 139.664,53.816 139.135,53.816 138.918,53.599 138.918,53.433 139.69,52.661 152.144,52.661 155.47,55.987 155.47,59.503 153.686,61.287 ; v1(153.005,61.968) 153.686,61.287 ; XP2.6 163.73,62.81 163.13,62.21 156.473,62.21 155.55,61.287 153.686,61.287
Out2_P: D12.5 VD2.6 XP2.5 | length 39.9
  Top Layer w0.2: VD2.6 155.55,60.009 156.75,58.809 v1(156.75,58.793)
  Bottom Layer w0.2: D12.5 137.622,53.816 138.151,53.816 138.368,53.599 138.368,53.205 139.462,52.111 152.371,52.111 156.02,55.759 156.02,58.063 v1(156.75,58.793) ; v1@156.75,58.809 156.75,59.001 155.939,59.812 155.939,60.898 156.701,61.66 164.087,61.66 165.17,62.743 166.013,62.743 XP2.5
Out3_N: D13.6 VD3.3 XP2.10 | length 41.6
  Top Layer w0.2: v1(153.005,74.4) 153.143,74.262 154.113,74.262 VD3.3 ; XP2.10@163.613,67.963 XP2.10
  Bottom Layer w0.2: D13.6 139.751,66.131 139.222,66.131 139.005,65.914 139.005,65.749 139.524,65.23 145.954,65.23 146.838,66.114 150.861,66.114 154.9,70.153 154.9,72.505 v1@153.143,74.262 ; v1(153.005,74.4) v1@153.143,74.262 ; XP2.10 163.73,67.89 163.13,67.29 162.964,67.29 162.318,67.936 160.814,67.936 158.107,70.643 158.107,73.15 157.668,73.589 156.129,73.589 156.119,73.599 155.332,73.599 155.137,73.404 154.971,73.404 154.113,74.262 v1@153.143,74.262
Out3_P: D13.5 VD3.6 XP2.9 | length 42.1
  Top Layer w0.2: VD3.6@155.55,72.35 VD3.6 155.55,72.3 156.505,71.345 v1(156.564,71.345)
  Bottom Layer w0.2: D13.5 137.709,66.131 138.238,66.131 138.455,65.914 138.455,65.521 139.296,64.68 146.181,64.68 147.065,65.564 151.089,65.564 155.45,69.925 155.45,70.34 156.455,71.345 v1(156.564,71.345) 156.564,71.618 155.443,72.74 155.443,72.932 155.56,73.049 155.892,73.049 155.901,73.039 157.44,73.039 157.557,72.922 157.557,70.415 160.586,67.386 162.09,67.386 162.737,66.74 164.087,66.74 165.17,67.823 166.013,67.823 XP2.9
Reset: D1.15 D2.15 D7.7 D7.15 D8.15 D9.15 D10.7 D10.15 XP1.2 | length 166.7
  Top Layer w0.3: D9.15 77.175,63.768 D7.7 82.936,58.007 88.016,58.007 D7.15 96.422,58.793 ; v1(91.826,42.884) 91.985,43.043 97.137,43.043 97.919,42.261 97.919,41.655 98.749,40.825 D1.15 ; D8.15 D8.15@96.449,70.825 ; v1@99.412,77.45 v1(99.15,77.45) 100.299,76.301 100.299,74.675 D8.15@96.449,70.825 ; D2.15 96.422,58.793 ; 106.11,80.717 106.11,87.629 107.31,88.829 D10.7 111.12,85.024 116.2,85.024 D10.15 ; 96.422,58.793 96.422,62.271 97.507,63.356 97.507,69.767 D8.15@96.449,70.825
  Bottom Layer w0.3: XP1.2 37.03,56.62 55.224,56.62 56.525,57.921 64.151,57.921 67.55,61.32 67.55,62.614 68.553,63.617 77.332,63.617 79.126,61.823 D7.7 ; v1(91.826,42.884) 91.944,43.002 91.944,54.079 D7.15 ; v1(99.15,77.45) 99.15,77.606 103.958,82.414 105.267,82.414 105.97,81.711 105.97,79.995 v1(105.955,79.98)
S0: D7.11 D11.11 D12.11 D13.11 | length 122.1
  Top Layer w0.3: v1(81.854,41.402) 81.823,41.371 80.769,41.371 79.384,39.986 79.384,38.992 86.01,32.367 90.797,32.367 91.5,31.664 135.47,31.664 138.573,34.767 138.573,37.312 139.913,38.652 D11.11 ; v1(139.913,48.285) 139.913,52.105 138.713,53.305 138.713,56.863 139.913,58.063 D12.11 139.913,64.77 138.8,65.883 138.8,72.8 D13.11
  Bottom Layer w0.3: D7.11 81.784,54.079 v1@81.784,41.402 ; D11.11 v1(139.913,48.285)
S1: D7.14 D10.1 D11.10 D12.10 D13.10 | length 146.8
  Top Layer w0.3: v1(89.286,43.25) 89.404,43.132 89.404,34.608 91.749,32.264 133.53,32.264 136.173,34.907 136.173,35.761 138.573,38.161 138.573,43.241 139.416,44.084 141.253,44.084 D11.10 ; v1(142.453,48.285) 142.453,52.274 141.253,53.474 141.253,54.953 142.453,56.153 D12.10 142.453,64.77 141.34,65.883 141.34,72.8 D13.10 142.54,74.269 144.224,75.953 v1(144.224,76.215)
  Bottom Layer w0.3: D7.14 89.404,54.079 v1@89.404,43.254 ; D10.1 123.15,89.434 125.931,89.434 126.946,90.45 129.989,90.45 v1(144.224,76.215) ; D11.10 v1(142.453,48.285)
S2: D10.14 D11.9 D12.9 D13.9 | length 65.2
  Top Layer w0.3: D11.9 145,42.891 145,52.267 143.793,53.474 143.793,55.057 144.993,56.257 D12.9 144.583,62.094 144.583,64.854 143.88,65.557 143.88,72.8 D13.9
  Bottom Layer w0.3: D10.14 119.27,83.014 135.89,83.014 144.904,74 D13.9 ; D11.9 D11.9@144.996,42.887
pads on no net: D1.9 D1.11 D4.11 D4.12 D4.13 D7.3 D7.4 D7.5 D7.12 D7.13 D9.9 D9.12 D10.3 D10.4 D10.5 D10.11 D10.12 D10.13 XP1.3 XP1.4 XP1.5 XP1.6 XP1.7 XP1.8

## Silkscreen, mask and mechanical layers (free items; w line width, h text height)
Top Mechanical 1/Mechanical 2:
  lines w0.3: 30,41 40,41 40,31 158,31 158,41 ; 30,41.057 30,85 40,85 40,95 158,95 158,90 158,85 168,85 168,40.941 ; 158,40.941 167.941,40.941